# Altium PCB IP2363_DEMO_V1.10.pcbdoc
Units mil, origin at the board's own origin, x right, y up, seen from the top; angles counter-clockwise.
Board outline 3392.52 x 2575 mil, 2 copper layers (Top Layer, Bottom Layer); 52 components, 40 nets, 171 pads, 183 vias.
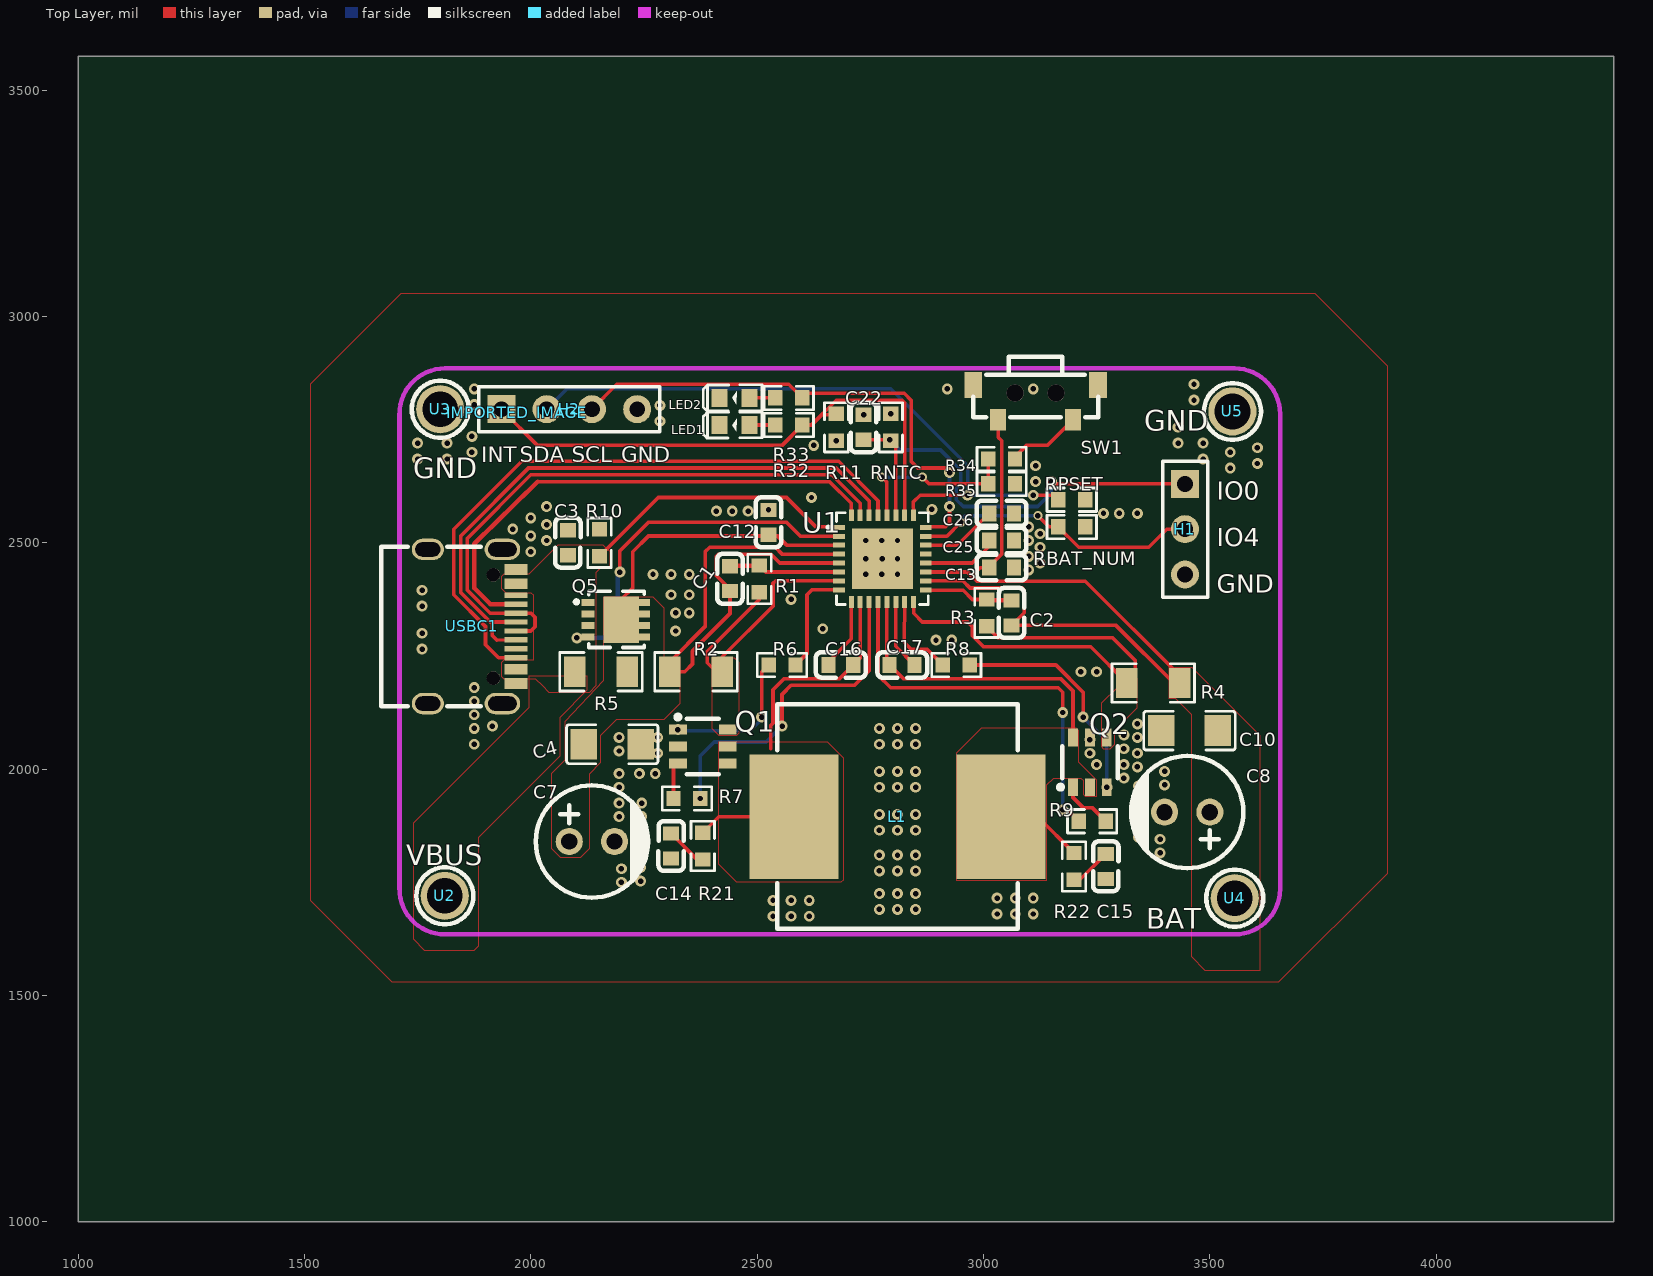
[diagram p0: Top Layer view]
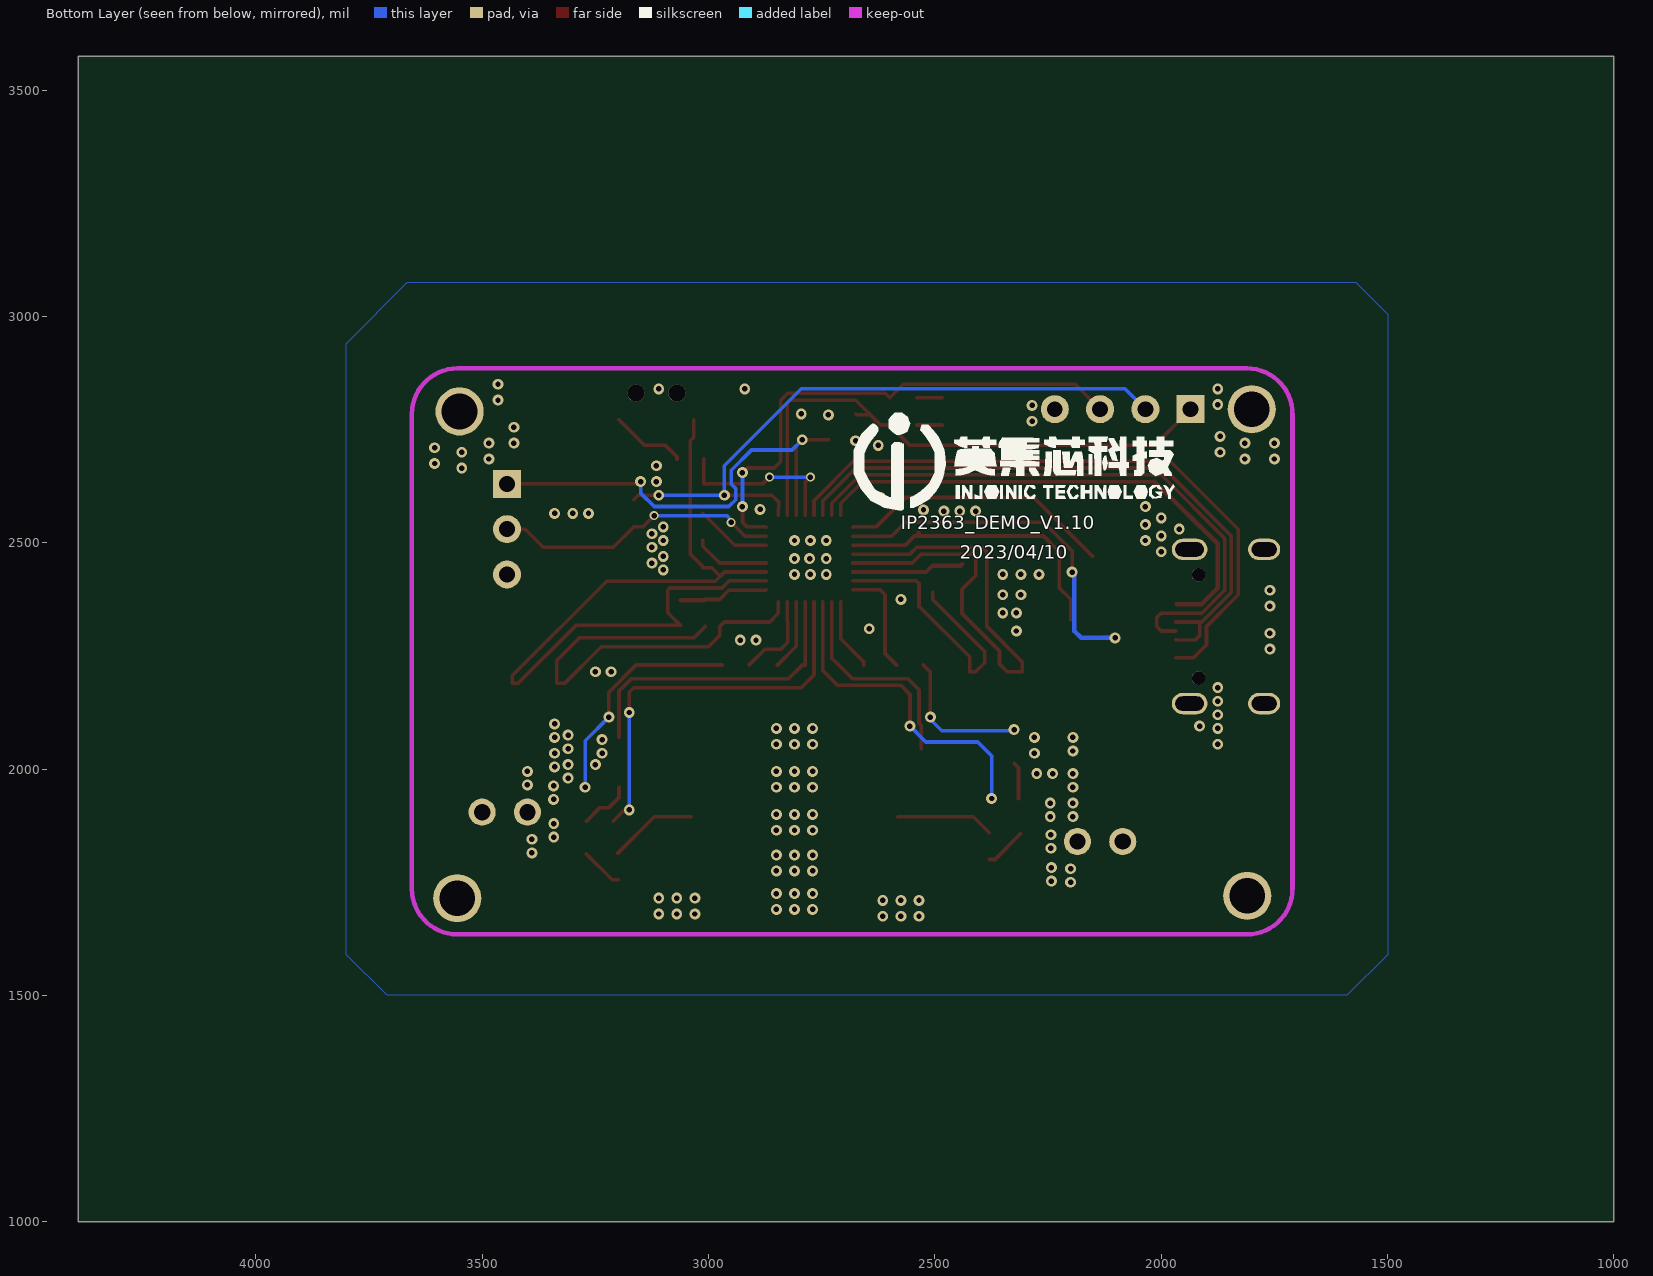
[diagram p1: Bottom Layer view, seen from below]

## Layer stack, top to bottom
Top Layer: signal copper (thickness not stored)
Dielectric: dielectric 12.6, FR-4, Dk 4.8
Bottom Layer: signal copper (thickness not stored)

## Board outline
4392.52,1000 1000,1000 1000,3575 4392.52,3575

## Components (designator, comment, footprint, x,y, rotation, side; value= is the part's Value field where it differs from the comment)
C1 "470nF" C0603 2440,2420.8 r90 top
C2 "1uF" C0603 3061.78,2345 r270 top
C3 "0.1u" C0603 2081.78,2500 r270 top
C4 "22uF" C1206 2180,2055 r0 top
C7 "100uF/35V" CAP-D6.3-F2.5 2135,1840 r0 top
C8 "100uF/35V" CAP-D6.3-F2.5 3450,1905 r180 top
C10 "22uF" C1206 3455,2085 r180 top
C12 "2.2uF" C0603 2524.98,2545 r270 top
C13 "2.2uF" C0603 3040,2445 r0 top
C14 "NC" C0603 2310,1830 r270 top
C15 "NC" C0603 3270,1785 r270 top
C16 "0.1uF" C0603 2685,2230 r0 top
C17 "0.1uF" C0603 2820,2230 r180 top
C22 "0.1uF" C0603 2735,2755 r90 top
C25 "2.2uF" C0603 3040,2505 r0 top
C26 "2.2uF" C0603 3040,2565 r0 top
H1 "HDR-F-2.54_1x3" HDR-F-2.54_1X3 3445,2530 r270 top
H2 "HDR-F-2.54_1x4" HDR-F-2.54_1X4 2085,2795 r0 top
IMPORTED_IMAGE "IMPORTED_IMAGE" IMPORTED_IMAGE 1970.02,2787.27 r0 top
L1 "4.7uH" IND-SMD_L12.6-W13.5 2810,1895 r0 top
LED1 "LED-0603_B" LED0603_BLUE 2450,2760 r180 top
LED2 "LED-0603_B" LED0603_BLUE 2450,2820 r180 top
Q1 "AP6H04LI" SOT-23-6_L2.9-W1.6-P0.95-LS2.8-BR 2380,2050 r180 top
Q2 "AP6H04LI" SOT-23-6_L2.9-W1.6-P0.95-LS2.8-BR 3235,2015 r270 top
Q5 "RU3030M2" PDFN3333-8_L3.1-W3.2-P0.65-LS3.4-BL 2186.78,2330 r270 top
R1 "51R" R0603 2505,2420 r90 top
R2 "0.005R" R1206 2365,2215 r0 top
R3 "10R" R0603 3006.78,2345 r90 top
R4 "0.005R" R1206 3375,2190 r0 top
R5 "0R" R1206 2155,2215 r0 top
R6 "0R" R0603 2555,2230 r0 top
R7 "0R" R0603 2345,1935 r0 top
R8 "0R" R0603 2940,2230 r180 top
R9 "0R" R0603 3240,1885 r180 top
R10 "10K" R0603 2151.78,2500 r90 top
R11 "510K" R0603 2675,2755 r90 top
R21 "NC" R0603 2380,1830 r90 top
R22 "NC" R0603 3200,1785 r90 top
R32 "100R" R0603 2570,2760 r180 top
R33 "100R" R0603 2570,2820 r180 top
R34 "43K" R0603 3040,2685 r0 top
R35 "10K" R0603 3040,2630 r0 top
RBAT_NUM "27K" R0603 3195,2535 r180 top
RNTC "10K" R0603 2795,2755 r270 top
RPSET "27K" R0603 3195,2595 r180 top
SW1 "1TS002G-1900-3500-CT" KEY-SMD_1TS002G 3115,2810 r180 top
U1 "IP2363" QFN-32_L5.0-W5.0-P0.50-TL-EP3.4 2776.78,2465 r0 top
U2 "VBUS" TESTPOINT-TH_BD3.2 1810,1720 r0 top
U3 "GND" TESTPOINT-TH_BD3.2 1800,2795 r0 top
U4 "BAT" TESTPOINT-TH_BD3.2 3555,1715 r0 top
U5 "GND" TESTPOINT-TH_BD3.2 3550,2790 r0 top
USBC1 "TYPE-C-31-M-12" USB-C_SMD-TYPE-C-31-M-12 1869.99,2315.02 r270 top

## Footprints (in the part's own frame and the unit in brackets; to place one, negate y for a bottom-side part, rotate by r counter-clockwise, add the part's x,y. Pads: shape width x height; smd on the part's side, far side on the other; paste and mask are expansions set on the pad)
C0603 [mm]
  rect 0.8x0.9 smd: 1(-0.7,0) 2(0.7,0)
  silkscreen extent -1.41,-0.71 1.39,0.72
C1206 [mm]
  rect 1.485x1.728 smd: 1(-1.593,0) 2(1.593,0)
  silkscreen extent -2.56,-1.09 2.56,1.09
CAP-D6.3-F2.5 [mil]
  round 60 hole 36: 1(-50,0) 2(50,0)
  silkscreen extent -124,-124 125,124
HDR-F-2.54_1X3 [mil]
  rect 62x62 hole 35: 1(-100,0)
  round 62 hole 35: 2(0,0)
  round 62 hole 36: 3(100,0)
  silkscreen extent -150,-49 150,50
HDR-F-2.54_1X4 [mil]
  rect 62x62 hole 35: 1(-150,0)
  round 62 hole 35: 2(-50,0) 3(50,0) 4(150,0)
  silkscreen extent -200,-50 200,50
IMPORTED_IMAGE [mil]
IND-SMD_L12.6-W13.5 [mm]
  rect 5x7 smd: 1(-5.8,0) 2(5.8,0)
  silkscreen extent -6.75,-6.3 6.75,6.3
KEY-SMD_1TS002G [mm]
  rect 0.9x1.2 smd: 1(-2.1,0.975) 2(2.1,0.975)
  rect 1x1.45 smd: 3(3.5,-0.975) 4(-3.5,-0.975)
  round 0.95 hole 0.95 unplated: ""(-1.15,-0.525) ""(1.15,-0.525)
  silkscreen extent -3.52,-2.56 3.5,0.85
LED0603_BLUE [mm]
  rect 0.9x1 smd: 1(-0.85,0) 2(0.85,0)
  silkscreen extent -1.54,-0.73 1.75,0.73
PDFN3333-8_L3.1-W3.2-P0.65-LS3.4-BL [mm]
  rect 0.4x0.75 smd: 1(-0.975,-1.533) 2(-0.325,-1.533) 3(0.325,-1.533) 4(0.975,-1.533)
  rect 0.4x0.8 smd: 5(0.975,1.533) 6(0.325,1.533) 7(-0.325,1.533) 8(-0.975,1.533)
  rect 2.6x2 smd: 9(-0.005,0.333)
  silkscreen extent -1.59,-2.29 1.56,1.61
QFN-32_L5.0-W5.0-P0.50-TL-EP3.4 [mm]
  rect 0.665x0.28 smd: 1(-2.432,1.75) 2(-2.432,1.25) 3(-2.432,0.75) 4(-2.432,0.25) 5(-2.432,-0.25) 6(-2.432,-0.75) 7(-2.432,-1.25) 8(-2.432,-1.75) 17(2.432,-1.75) 18(2.432,-1.25) 19(2.432,-0.75) 20(2.432,-0.25) 21(2.432,0.25) 22(2.432,0.75) 23(2.432,1.25) 24(2.432,1.75)
  rect 0.28x0.665 smd: 9(-1.75,-2.432) 10(-1.25,-2.432) 11(-0.75,-2.432) 12(-0.25,-2.432) 13(0.25,-2.432) 14(0.75,-2.432) 15(1.25,-2.432) 16(1.75,-2.432) 25(1.75,2.432) 26(1.25,2.432) 27(0.75,2.432) 28(0.25,2.432) 29(-0.25,2.432) 30(-0.75,2.432) 31(-1.25,2.432) 32(-1.75,2.432)
  rect 3.4x3.4 smd: 33(0,0)
  silkscreen extent -3.11,-2.58 2.58,2.58
R0603 [mil]
  rect 31.75x34.02 smd: 1(-29.66,0) 2(29.66,0)
  silkscreen extent -55,-26 55,26
R1206 [mil]
  rect 47.54x66.97 smd: 1(-58.22,0) 2(58.22,0)
  silkscreen extent -91,-42 91,42
SOT-23-6_L2.9-W1.6-P0.95-LS2.8-BR [mm]
  rect 1x0.55 smd: 1(1.4,-0.95) 2(1.4,0) 3(1.4,0.95) 4(-1.4,0.95) 5(-1.4,0) 6(-1.4,-0.95)
  silkscreen extent -0.9,-1.78 1.52,1.55
TESTPOINT-TH_BD3.2 [mm]
  round 2.7 hole 2: 1(0,0)
  silkscreen extent -1.6,-1.6 1.6,1.6
USB-C_SMD-TYPE-C-31-M-12 [mm]
  oval 1.2x2 hole 0.8 slot 1.6 at 90 deg: 0(-4.325,1.706) 1(4.325,1.706)
  oval 1.2x1.8 hole 0.8 slot 1.4 at 90 deg: 2(4.325,-2.474) 3(-4.325,-2.474)
  rect 0.3x1.3 smd: A1(-3.35,2.474) A4(-2.55,2.474) A5(-1.25,2.474) A6(-0.25,2.474) A7(0.25,2.474) A8(1.25,2.474) A9(2.55,2.474) A12(3.35,2.474) B1(3.05,2.474) B4(2.25,2.474) B5(1.75,2.474) B6(0.75,2.474) B7(-0.75,2.474) B8(-1.75,2.474) B9(-2.25,2.474) B12(-3.05,2.474)
  round 0.75 hole 0.75 unplated: ""(-2.9,1.206) ""(2.9,1.206)
  silkscreen extent -4.47,-5.09 4.47,0.49

## Via types
v1: diameter 24, hole 12, Top Layer to Bottom Layer, tented both sides, 179 vias
v2: diameter 20, hole 12, Top Layer to Bottom Layer, tented both sides, 4 vias

## Nets (pads, with @x,y where several pads share a name; then routed paths per layer and width w, separated by ;. In a path a pad name is that pad's centre, name@x,y a point inside that pad or via, vN(x,y) a via of type N, cw(c..) or ccw(c..) an arc to the next point about the centre after c; other vN are vias at no path point)
BAT: C2.2 C8.1 C10.1 C13.1 R4.2 SW1.2 U1.18 U1.19 U4.1 | length 1799
  Top Layer w8: U1.18@2872.58,2415.8 2954.18,2415.8 2969.98,2400 3084.98,2400 3089.98,2395 3089.98,2345.7 C2.2 3292.58,2317.4 3419.98,2190 R4.2 3433.18,2206.8 3224.98,2415 2984.98,2415 2964.48,2435.5 U1.19@2872.58,2435.5 ; 2974.08,2426 2993.08,2445 C13.1@3012.48,2445 ; C13.1 3012.44,2447.44 3040,2475 3040,2725 3032.33,2732.67 SW1.2
BAT_NUM: H1.2 RBAT_NUM.2 U1.23 | length 639.9
  Top Layer w8: U1.23 2919.21,2514.21 v2(2950,2545) ; v2(3120,2560) 3145,2535 RBAT_NUM.2 3210.34,2490 3365,2490 3405,2530 H1.2
  Bottom Layer w8: v2(2950,2545) 2949.98,2550 2959.98,2560 v2(3120,2560)
C1_2: C1.2 R1.2 U1.6 | length 248.1
  Top Layer w8: R1.2 2519.19,2435.47 U1.6
  Top Layer w10: C1.2@2440,2452.56 2442.9,2449.66 R1.2
C2_1: C2.1 R3.2 U1.17 | length 198.9
  Top Layer w8: U1.17@2872.58,2396.1 2873.68,2395 2955.08,2395 2975.38,2374.7 R3.2
  Top Layer w10: R3.2 3008.88,2372.56 C2.1
C14_1: C14.1 R21.1 | length 93.7
  Top Layer w8: C14.1 2367.22,1800.34 R21.1
C15_1: C15.1 R22.1 | length 93.7
  Top Layer w8: R22.1 3212.78,1755.34 C15.1
C16_1: C16.1 U1.9 | length 160.1
  Top Layer w8: C16.1 2657.44,2237.46 2707.88,2287.9 U1.9
C17_1: C17.1 U1.14 | length 156.3
  Top Layer w8: U1.14 2806.31,2271.25 C17.1
CC1: U1.32 USBC1.A5 | length 1137.9
  Top Layer w8: 2014.98,2635 2659.98,2635 2707.88,2587.1 U1.32
  Top Layer w10: USBC1.A5@1965.28,2364.6 1910.38,2364.6 1874.98,2400 1874.98,2497.9 2015,2635
CC2: U1.29 USBC1.B5 | length 1430.7
  Top Layer w8: USBC1.B5 1928.88,2246.12 1900,2275 1900,2315 1830,2385 1830,2530 1980,2680 2680,2680 2766.94,2593.06 U1.29
DM: U1.31 USBC1.A7 USBC1.B7 | length 1333.9
  Top Layer w8: USBC1.B7 1910.45,2344.55 1860,2395 1860,2510 2000,2650 2665,2650 2727.57,2587.43 U1.31 ; USBC1.A7@1967.8,2305.16 2000.16,2305.16 2010,2315 2010,2335 2000.47,2344.53 USBC1.B7@1967.8,2344.53
DP: U1.30 USBC1.A6 USBC1.B6 | length 1382.2
  Top Layer w8: 1914.98,2320 1914.98,2295 1924.98,2285 USBC1.B6 ; USBC1.A6 1910.14,2324.86 1845,2390 1845,2515 1995,2665 2675,2665 2747.25,2592.75 U1.30@2747.25,2560.76
EN: R34.1 R35.1 U1.28 | length 385.6
  Top Layer w8: v2(2775,2645) 2786.62,2633.38 U1.28 ; v2(2865,2645) 2880,2630 R35.1 R34.1
  Bottom Layer w8: v2(2775,2645) v2(2865,2645)
GND: C3.1 C4.2 C7.2 C8.2 C10.2 C12.1 C13.2 C14.2 C15.2 C22.2 C25.2 C26.2 H1.3 H2.4 LED1.2 LED2.2 Q1.2 Q2.5 R10.2 R11.1 R35.2 RBAT_NUM.1 RNTC.1 RPSET.1 SW1.3 SW1.4 U1.21 U1.33 U3.1 U5.1 USBC1.0 USBC1.1 USBC1.2 USBC1.3 USBC1.A1 USBC1.A12 USBC1.B1 USBC1.B12
  other v1: 2535,1675 2575,1675 2615,1675 3030,1680 3070,1680 3110,1680 2770,1690 2810,1690 2850,1690 2535,1710 2575,1710 2615,1710 3030,1715 3070,1715 3110,1715 2770,1725 2810,1725 2850,1725 2200,1750 2242.68,1752.55 2770,1775 2810,1775 2850,1775 2200,1780 2242.68,1782.55 2770,1810 2810,1810 2850,1810 3390,1815 2243.79,1825.14 3390,1845 3341.79,1849.67 2243.79,1855.14 2770,1865 2810,1865 2850,1865 3341.79,1879.67 2195,1895 2245,1895 2770,1900 2810,1900 2850,1900 2195,1925 2245,1925 3342.16,1933 2195,1960 2770,1960 2810,1960 2850,1960 3342.16,1963 3400,1965 3310,1980 2195,1990 2240,1990 2275,1990 2770,1995 2810,1995 2850,1995 3400,1995 3340,2005 3250,2010 3310,2010 2280,2035 3235,2035 3340,2035 2195,2040 3310,2045 1875,2055 2770,2055 2810,2055 2850,2055 3235,2065 2195,2070 2280,2070 3340,2070 3310,2075 1875,2090 2770,2090 2810,2090 2850,2090 1915,2095 3340,2100 1875,2120 1875,2150 1875,2180 3215,2215 3250,2215 1760,2265 2895,2285 2930,2285 1760,2300 2320,2305 2645,2310 2320,2345 2350,2345 1760,2360 2575,2375 2310,2385 2350,2385 1760,2395 2270,2430 2310,2430 2350,2430 2740,2430 2775,2430 2810,2430 3100,2440 3125,2455 2740,2465 2776.78,2465 2810,2465 3100,2470 2000,2480 3125,2490 2035,2505 2740,2505 2775,2505 2810,2505 3100,2505 2000,2515 3125,2520 1960,2530 3100,2535 2035,2540 2000,2555 3265,2565 3300,2565 3340,2565 2410,2570 2445,2570 2480,2570 2525,2572.56 2886.09,2573.85 2035,2580 2620,2600 3115,2635 3545,2665 3115,2670 3605,2675 1750,2685 1815,2685 3485,2685 1870,2700 3545,2700 3605,2710 2625,2715 1750,2720 1815,2720 3430,2720 3485,2720 2675,2725.34 1870,2735 3430,2755 2285,2768.51 2735,2782.56 2795,2784.66 2285,2803.51 1875,2805 3465,2815 1875,2840 2920,2840 3110,2840 3465,2850
HG1: R6.2 U1.8 | length 241.1
  Top Layer w8: R6.2 2610,2255.34 2610,2385 2621.1,2396.1 U1.8
HG2: R8.2 U1.15 | length 195.3
  Top Layer w8: U1.15 2824.98,2280 2839.98,2265 2875.38,2265 R8.2@2910.38,2230
LED1/I2C_INT: H2.1 R11.2 R32.1 U1.26 | length 1250
  Top Layer w8: H2.1 2014.98,2715 2554.98,2715 R32.1 ; R32.1 2620,2760 2675,2815 2820,2815 2825.99,2809.01 U1.26 ; 2642.33,2782.33 2672.67,2782.33 R11.2
LED2/I2C_SCL: H2.3 R33.1 U1.24 | length 1148
  Top Layer w8: H2.3 2189.98,2850 2569.68,2850 R33.1 ; R33.1 2609.66,2830 2825,2830 2840,2815 2840,2680 2855,2665 2915,2665 v1(2925,2655) ; U1.24 2873.64,2535 2915,2535 2925,2545 v1(2925,2580)
  Bottom Layer w8: v1(2925,2580) v1(2925,2655)
LG1: R7.2 U1.11 | length 737.9
  Top Layer w8: v1(2555,2095) 2555,2165.02 2574.98,2185 2714.98,2185 2747.28,2217.3 U1.11
  Bottom Layer w8: v1(2374.66,1935) 2374.68,2029.7 2404.98,2060 2520,2060 v1(2555,2095)
LG2: R9.2 U1.12 | length 890.7
  Top Layer w8: U1.12 2766.94,2208.06 2795,2180 3165,2180 3175,2170 v1(3175,2125) ; v1(3175,1910) 3185.34,1910 R9.2
  Bottom Layer w8: v1(3175,1910) v1(3175,2125)
LX1: C16.2 L1.1 Q1.4 Q1.5 R21.2 U1.10 | length 694.2
  Top Layer w8: R21.2 2415.34,1895 L1.1@2581.65,1895 ; 2530,2045 2530,2096.5 2535,2101.5 2535,2175 2560,2200 2682.56,2200 C16.2 2727.57,2245.01 U1.10
LX2: C17.2 L1.2 Q2.2 Q2.6 R22.2 U1.13 | length 871.3
  Top Layer w8: U1.13 2786.58,2230 2792.48,2230 2822.48,2200 3169.98,2200 3197.58,2172.4 Q2.6 ; L1.2@3038.35,1895 3119.65,1895 R22.2
NTC: C22.1 H1.1 RNTC.2 U1.27 | length 1035
  Top Layer w8: C22.1 v1(2792.9,2727.44) RNTC.2 2806.31,2714.03 U1.27 ; v1(3150,2635) 3155,2630 H1.1
  Bottom Layer w8: v1(2792.9,2727.44) 2815.38,2705 2904.98,2705 2949.98,2660 2949.98,2630 2939.98,2620 2939.98,2595 2954.98,2580 3119.98,2580 3149.98,2610 3149.98,2625 v1(3150,2635)
PSET/I2C_SDA: H2.2 RPSET.2 U1.25 | length 1444
  Top Layer w8: U1.25 2844.98,2590 2859.98,2605 v1(2964.98,2605) ; v1(3110,2605) 3155.34,2605 RPSET.2
  Bottom Layer w8: H2.2 2079.98,2840 2794.98,2840 2964.98,2670 v1(2964.98,2605) v1(3110,2605)
R2_2: Q1.6 R1.1 R2.2 U1.7 | length 634.1
  Top Layer w8: R1.1 2504.98,2375 2389.98,2260 2389.98,2235 2409.98,2215 R2.2 2423.22,2248.22 2535,2360 2535,2410 2540.79,2415.79 U1.7
R4_1: Q2.4 R3.1 R4.1 U1.16 | length 999.2
  Top Layer w8: U1.16 2845.68,2344.3 2864.98,2325 2964.98,2325 2974.98,2315 2974.98,2295 2999.98,2270 3236.78,2270 R4.1 3334.98,2190 3334.98,2240 3284.98,2290 3032.08,2290 R3.1
R6_1: Q1.1 R6.1 | length 322.8
  Top Layer w8: v1(2510,2115) 2510,2214.66 R6.1
  Bottom Layer w8: v1(2324.88,2087.4) 2327.28,2085 2484.98,2085 2509.98,2110 v1(2510,2115)
R7_1: Q1.3 R7.1 | length 81.6
  Top Layer w8: R7.1 2315.34,2003.06 Q1.3
R8_1: Q2.3 R8.1 | length 507
  Top Layer w8: R8.1 3159.98,2230 3219.98,2170 v1(3220,2115)
  Bottom Layer w8: v1(3220,2115) 3272.4,2062.6 v1(3272.4,1959.88)
R9_1: Q2.1 R9.1 | length 116.2
  Top Layer w8: Q2.1 3197.6,1937.4 3220,1915 3239.66,1915 R9.1
R32_2: LED1.1 R32.2 | length 56.9
  Top Layer w8: LED1.1 R32.2
R33_2: LED2.1 R33.2 | length 56.9
  Top Layer w8: LED2.1 R33.2
SW1_1: R34.2 SW1.1 | length 166.6
  Top Layer w8: R34.2 3069.66,2689.66 3095,2715 3141.07,2715 SW1.1
USBC1_A8: USBC1.A8
USBC1_B8: USBC1.B8
VBUS: C3.2 Q5.1 Q5.2 Q5.3 R5.1 R10.1 U1.1 U2.1 USBC1.A4 USBC1.A9 USBC1.B4 USBC1.B9 | length 610.3
  Top Layer w8: R10.1 2281.48,2600 2564.98,2600 2629.98,2535 2679.88,2535 U1.1
VBUSG: Q5.4 U1.2 | length 823.5
  Top Layer w8: v1(2196.78,2435) 2196.78,2481.8 2259.98,2545 2564.98,2545 2595.78,2514.2 U1.2
  Top Layer w10: v1(2101.78,2290) 2103.39,2291.61 Q5.4
  Bottom Layer w10: v1(2101.78,2290) 2176.78,2290 2191.78,2305 2191.78,2430 v1(2196.78,2435)
VCC5V: C25.1 U1.20 | length 167.9
  Top Layer w8: U1.20@2872.58,2455.2 2975.18,2455.2 3012.48,2492.4 C25.1@3012.48,2505
VCCIO: C26.1 U1.22 | length 169.1
  Top Layer w8: U1.22 2941.97,2494.53 C26.1
VIO: C1.1 C4.1 C7.1 C12.2 Q5.5 Q5.6 Q5.7 Q5.8 Q5.9 R2.1 R5.2 U1.3 U1.4 U1.5 | length 1868.2
  Top Layer w8: Q5.9 2199.88,2374.9 2224.98,2400 2224.98,2480 2259.98,2515 2544.98,2515 2564.98,2495 U1.3 ; C1.1@2439.98,2397 2439.98,2343.5 2357.08,2260.7 2357.08,2232.1 2339.98,2215 R2.1 2306.78,2236.8 2384.98,2315 2384.98,2480 2394.98,2490 2539.98,2490 2554.98,2475 U1.4 ; C1.1@2439.98,2397.4 2409.98,2427.4 2409.98,2470 2414.98,2475 2529.98,2475 2549.78,2455.2 U1.5 ; C12.2@2535,2522.44 C12.2@2537.54,2522.44
pads on no net: SW1. USBC1.

## Polygon pours and split planes (outlines as drawn)
GND on Bottom Layer (solid): 1570,3075 1500,3005 1500,1590 1590,1500 3710,1500 3800,1590 3800,2940 3665,3075 3585,3075
GND on Top Layer (solid): 1712.52,3050.4 1512.52,2850.4 1512.52,1710.4 1692.52,1530.4 3652.52,1530.4 3892.52,1770.4 3892.52,2890.4 3732.52,3050.4 3637.52,3050.4
VBUS on Top Layer (solid): 2060,2495 1995,2430 1940,2430 1935,2425 1935,2400 1945,2390 2000,2390 2005,2385 2005,2240 1940,2240 1935,2235 1935,2210 1935,2205 1940,2200 1995,2200 2000,2200 2010,2200 2025,2185 2040,2170 2130,2170 2145,2185 2145,2435 2155,2445 2170,2445 2175,2450 2175,2480 2160,2495
VIO on Top Layer (solid): 2160,2380 2160,2195 2075,2105 2075,2020 2045,1990 2045,1825 2065,1805 2110,1805 2130,1825 2130,1960 2130,1990 2155,2015 2155,2075 2190,2110 2295,2110 2330,2145 2330,2245 2295,2245 2295,2355 2270,2380
VBUS on Top Layer (solid): 1995,2205 1995,2135 1740,1880 1740,1625 1765,1600 1875,1600 1885,1610 1885,1785 1885,1850 2065,2030 2065,2115 2125,2175 2125,2205
R2_2 on Top Layer (solid): 2400,2245 2400,2090 2415,2075 2455,2075 2460,2080 2460,2235 2450,2245
LX1 on Top Layer (solid): 2415,2060 2655,2060 2690,2025 2690,1755 2685,1750 2455,1750 2415,1790
R4_1 on Top Layer (solid): 3295,2205 3295,2180 3260,2145 3260,2050 3265,2045 3280,2045 3290,2055 3290,2085 3340,2135 3340,2200
LX2 on Top Layer (solid): 3185,2090 2995,2090 2940,2035 2940,1755 3140,1755 3140,1965 3155,1980 3215,1980 3220,1975 3220,1945 3225,1940 3250,1940 3250,1975 3220,2005 3210,2015 3210,2085 3205,2090
BAT on Top Layer (solid): 3460,2225 3610,2075 3610,1555 3490,1555 3460,1585 3460,2120 3425,2155 3410,2155 3410,2225

## Keep-outs
Keep-Out Layer:
  lines w10: 1710,1735 ccw(c1810,1735) 1810,1635 ; 1710,2785 cw(c1810,2785) 1810,2885 ; 3555,1635 ccw(c3555,1735) 3655,1735 ; 3555,2885 cw(c3555,2785) 3655,2785

## Silkscreen, mask and mechanical layers (free items; w line width, h text height)
Top Overlay:
  text "GND" at 3355,2747.5 h45
  text "INT" at 1890,2677.5 h35
  text "SDA" at 1975.73,2677.5 h35
  text "SCL" at 2090.57,2677.5 h35
  text "GND" at 2200,2677.5 h35
  text "GND" at 1740,2642.5 h45
  text "IO0" at 3515,2595 h40
  text "IO4" at 3515,2492.5 h40
  text "GND" at 3515,2390 h40
  text "VBUS" at 1725,1787.5 h45
  text "BAT" at 3360,1647.5 h45
Bottom Overlay:
  text "IP2363_DEMO_V1.10" at 2575,2520 h51.18
  text "2023/04/10" at 2445,2455 h51.18
Bottom Solder:
  rectangle: 2647.5,2307.5 2902.5,2612.5